# Altium PCB binbot_board_ver6.PcbDoc
Units mm, origin at the board's own origin, x right, y up, seen from the top; angles counter-clockwise.
Board outline 120.96 x 80.83 mm, 2 copper layers (Top Layer, Bottom Layer); 22 components, 0 nets, 99 pads, 46 vias.
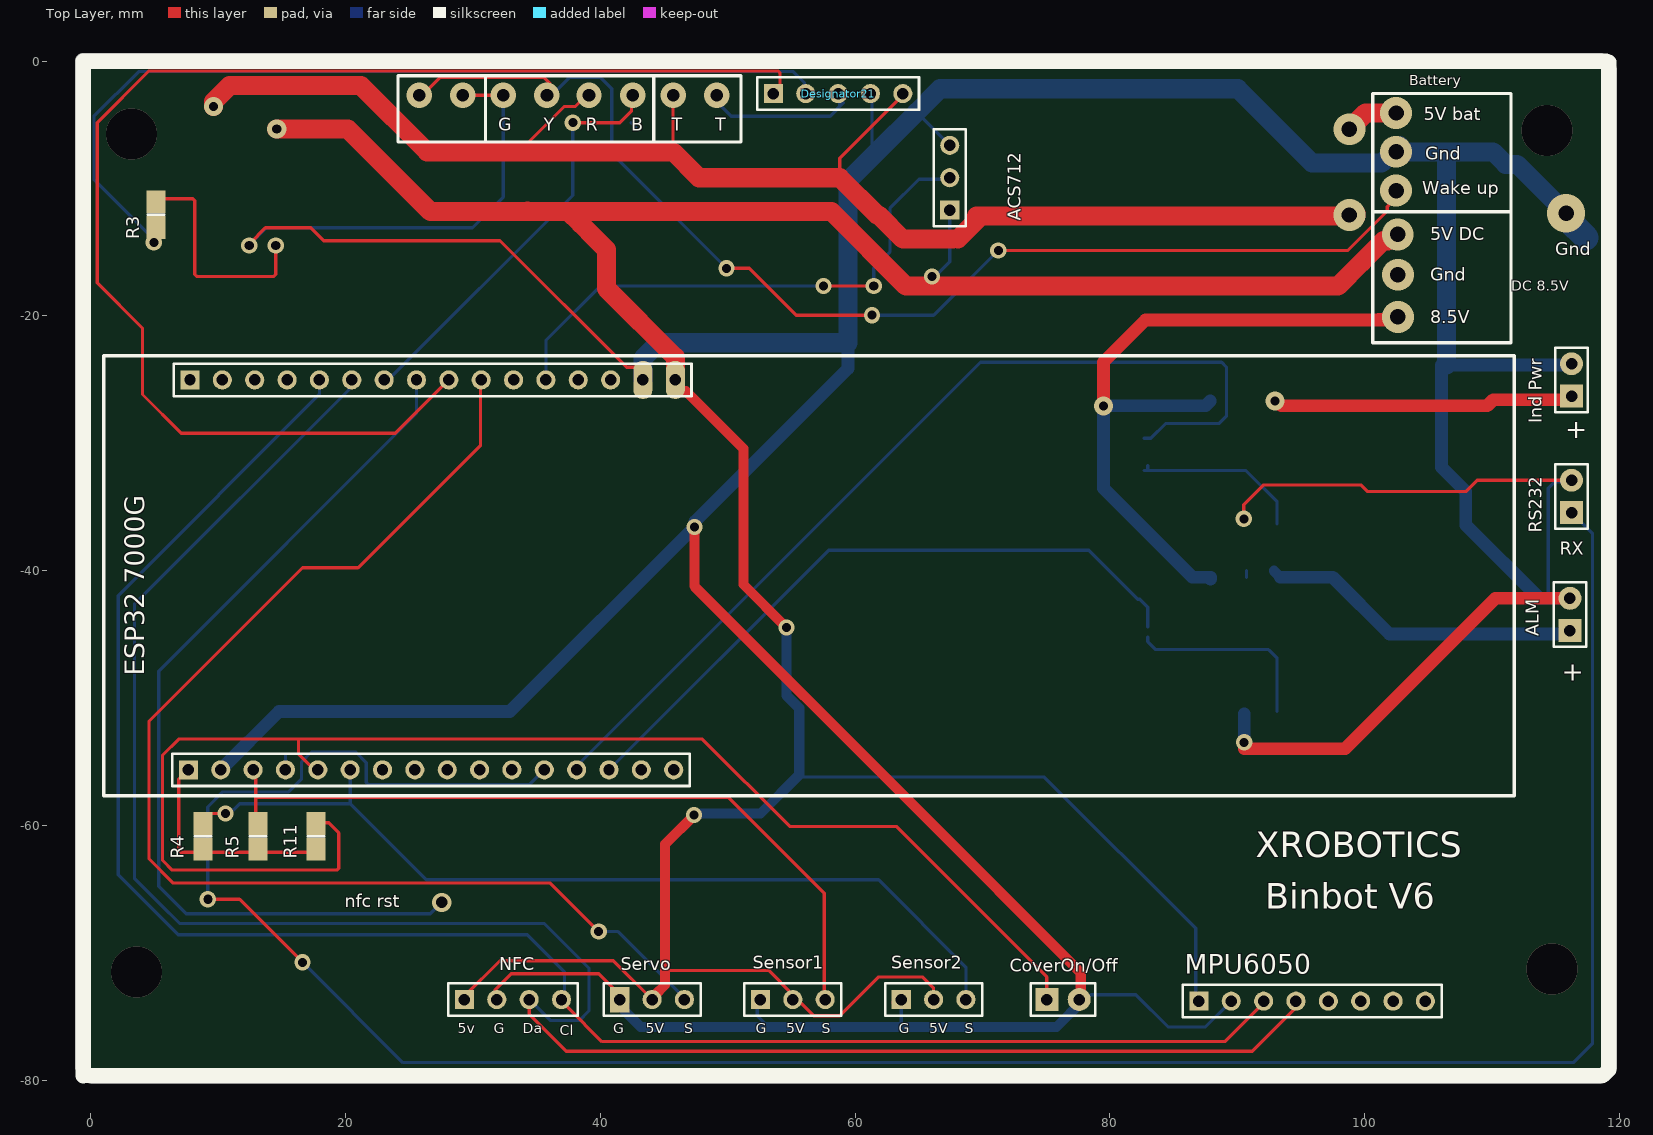
[diagram p0: Top Layer view]
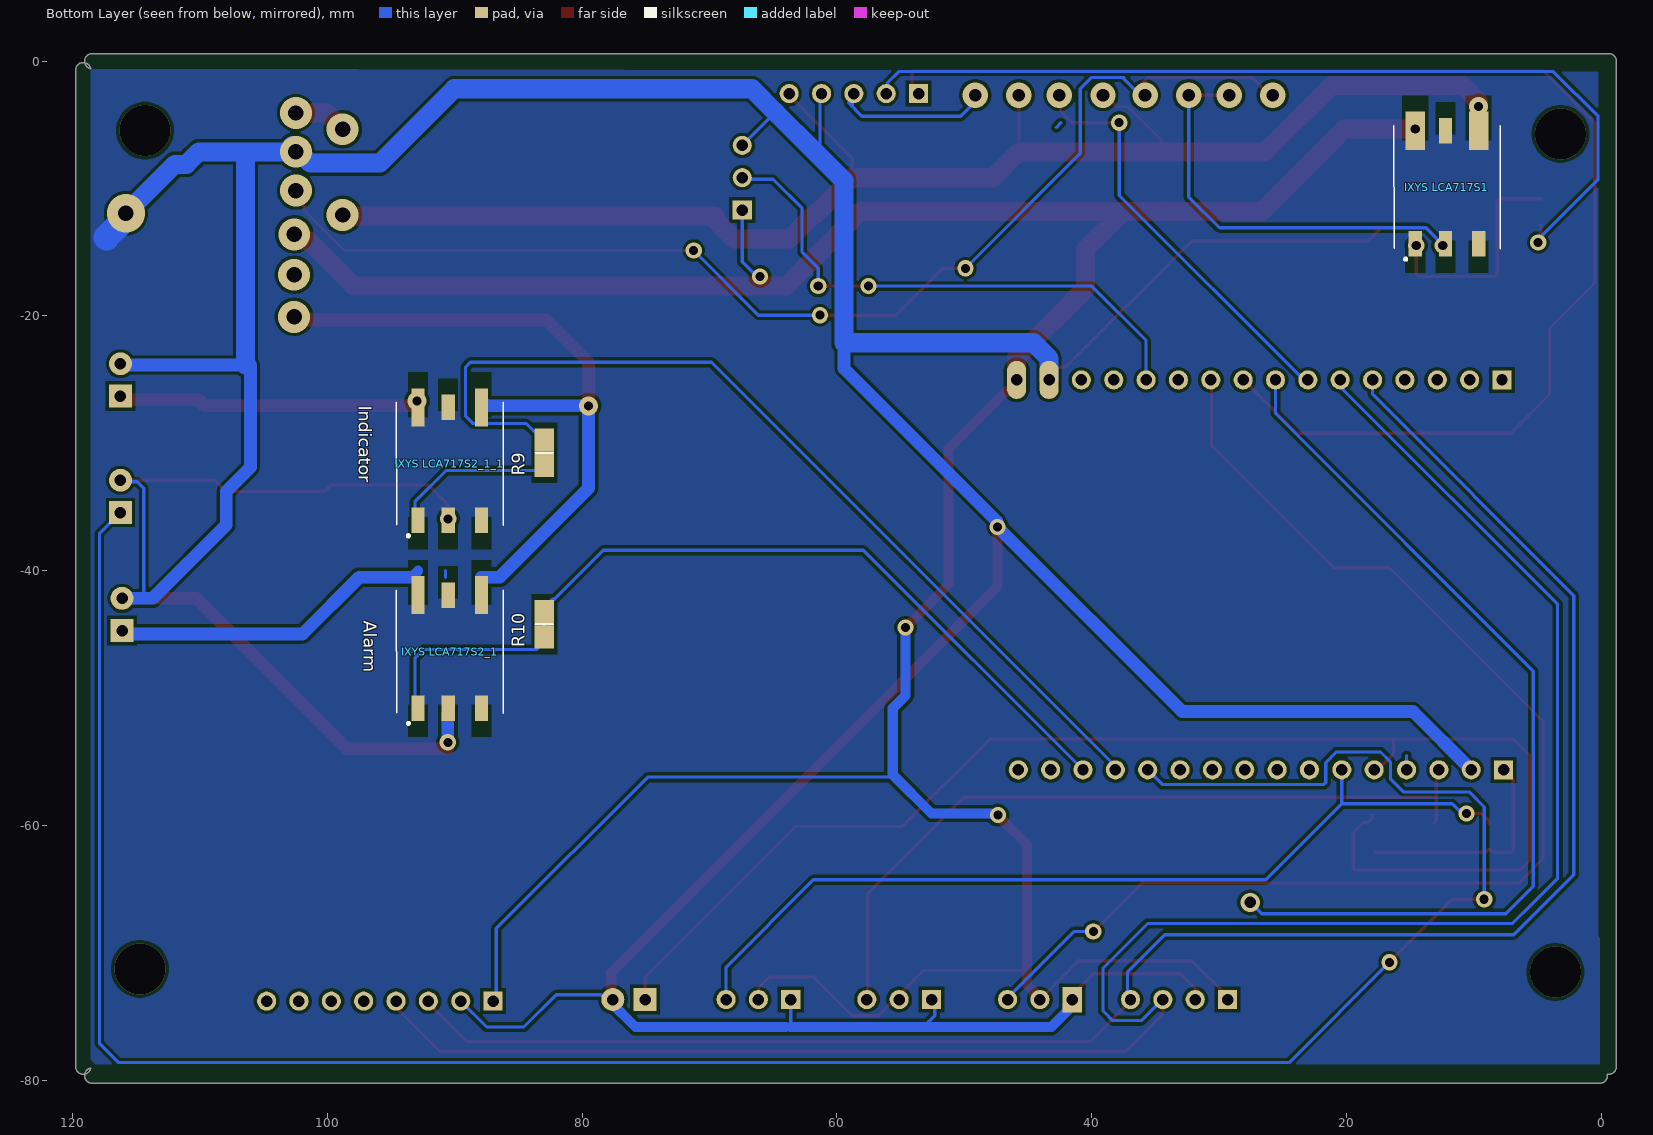
[diagram p1: Bottom Layer view, seen from below]

## Layer stack, top to bottom
Top Solder: solder mask 0.0102, Solder Resist, Dk 3.5
Top Layer: signal copper 0.0356
Dielectric 1: dielectric 0.32, FR-4, Dk 4.8
Bottom Layer: signal copper 0.0356
Bottom Solder: solder mask 0.0102, Solder Resist, Dk 3.5

## Board outline
-0.475,-79.516 cw(c-0.589,-78.926) -1.189,-78.926 -1.189,0 cw(c-0.589,0) -0.589,0.6 118.469,0.6 cw(c118.469,0) 119.07,0 119.059,-0.113 cw(c118.469,0) 118.583,-0.59 cw(c119.172,-0.703) 119.059,-0.113 cw(c119.172,-0.703) 119.773,-0.703 119.773,-78.926 cw(c119.172,-78.926) 119.059,-79.516 cw(c119.172,-78.926) 118.583,-79.039 cw(c118.469,-79.629) 119.059,-79.516 119.07,-79.629 cw(c118.469,-79.629) 118.469,-80.229 0.114,-80.229 cw(c0.114,-79.629)

## Design rules (kind name [scope] priority, off if disabled: settings)
Clearance [All] p1: gap=0.254 ignorepadtopadclearanceinfootprint=FALSE except(0: Arc-Hole Track-Hole SMDPad-Hole THPad-Hole Via-Hole Fill-Hole Poly-Hole Region-Hole Text-Hole)
PolygonConnect [All] p1: connectstyle=Relief reliefconductorwidth=0.254 reliefentries=4 polygonreliefangle="90 Angle" airgapwidth=0.254
RoutingVias [All] p1: holewidth=0.711 width=1.27 viastyle="Through Hole" minholewidth=0.711 minwidth=1.27 maxholewidth=0.711 maxwidth=1.27
SolderMaskExpansion [All] p1: expansion=0.102 istentingtop=FALSE
Width [All] p1: maxlimit=0.254 minlimit=0.254 preferedwidth=0.254
30 further rules are at their usual default settings.

## Components (designator, comment, footprint, x,y, rotation, side; value= is the part's Value field where it differs from the comment)
ACS712 "Comment" HDR1X3#1 67.437,-11.684 r90 top
ALM "Comment" HDR1X2 116.251,-26.289 r90 top
CoverOn/Off "Comment" HDR1X2 75.057,-73.66 r0 top
Designator21 "Comment" HDR1X5 53.594,-2.54 r0 top
"ESP32 7000G" "ESP32 7000G" HDR1X16#1 7.793,-25.019 r0 top
"Ind Pwr" "Comment" HDR1X2 116.124,-44.704 r90 top
"IXYS LCA717S1" "IXYS LCA717S" *SON160P500X500X140-6N#1 12.111,-9.897 r90 bottom
"IXYS LCA717S2_1" "IXYS LCA717S" *SON160P500X500X140-6N#2 90.394,-46.346 r90 bottom
"IXYS LCA717S2_1_1" "IXYS LCA717S" *SON160P500X500X140-6N#2 90.394,-31.614 r90 bottom
MPU6050 "Comment" HDR1X8 86.995,-73.787 r0 top
NFC "Comment" HDR1X4 29.337,-73.66 r0 top
R3 "0.5K Ohms" 6-0805_M 5.126,-12.065 r90 top (schematic designator R2)
R4 "4.7K Ohms" 6-0805_M 8.809,-60.833 r90 top (schematic designator R3)
R5 "4.7K Ohms" 6-0805_M 13.127,-60.833 r90 top (schematic designator R3)
R9 "0.5K Ohms" 6-0805_M 82.977,-30.75 r90 bottom (schematic designator R3)
R10 "0.5K Ohms" 6-0805_M 82.977,-44.212 r90 bottom (schematic designator R3)
R11 "4.7K Ohms" 6-0805_M 17.699,-60.833 r90 top (schematic designator R3)
RS232 "Comment" HDR1X2 116.251,-35.433 r90 top
Sensor1 "Comment" HDR1X3#1 52.578,-73.66 r0 top
Sensor2 "Comment" HDR1X3#1 63.627,-73.66 r0 top
Servo "Comment" HDR1X3#2 41.529,-73.66 r0 top
? "Comment" HDR1X16#2 7.666,-55.626 r0 top

## Footprints (in the part's own frame and the unit in brackets; to place one, negate y for a bottom-side part, rotate by r counter-clockwise, add the part's x,y. Pads: shape width x height; smd on the part's side, far side on the other; paste and mask are expansions set on the pad)
6-0805_M [mm] "Chip Resistor, Body 2.0x1.2mm, IPC Low Density"
  rect 1.8x1.5 smd: 1(-1,0) 2(1,0)
  silkscreen extent 0,-0.65 0,0.65, body extent -1.07,-0.7 1.07,0.7, height 0.7
*SON160P500X500X140-6N#1 [mm]
  rect 2x1.03 smd: 1(-4.436,2.489) 2(-4.436,0.127) 3(-4.436,-2.489) 5(4.436,0.127)
  rect 3x1.5 smd: 4(4.436,-2.489) 6(4.436,2.489)
  silkscreen extent -5.74,-4.19 4.83,4.19
*SON160P500X500X140-6N#2 [mm]
  rect 2x1.03 smd: 1(-4.436,2.489) 2(-4.436,0.127) 3(-4.436,-2.489) 5(4.436,0.127)
  rect 3x1.03 smd: 4(4.436,-2.489) 6(4.436,2.489)
  silkscreen extent -5.74,-4.19 4.83,4.19
HDR1X2 [mm] "Connector; Header; 2 Position"
  rect 1.8x1.8 hole 0.9: 1(0,0)
  round 1.8 hole 0.9: 2(2.54,0)
  silkscreen extent -1.27,-1.27 3.81,1.27
HDR1X3#1 [mm] "Connector; Header; 3 Position"
  rect 1.5x1.5 hole 0.9: 1(0,0)
  round 1.5 hole 0.9: 2(2.54,0) 3(5.08,0)
  silkscreen extent -1.27,-1.27 6.35,1.27
HDR1X3#2 [mm] "Connector; Header; 3 Position"
  rect 1.5x2 hole 0.9: 1(0,0)
  round 1.5 hole 0.9: 2(2.54,0) 3(5.08,0)
  silkscreen extent -1.27,-1.27 6.35,1.27
HDR1X4 [mm] "Connector; Header; 4 Position"
  rect 1.5x1.5 hole 0.9: 1(0,0)
  round 1.5 hole 0.9: 2(2.54,0) 3(5.08,0) 4(7.62,0)
  silkscreen extent -1.27,-1.27 8.89,1.27
HDR1X5 [mm] "Connector; Header; 5 Position"
  rect 1.5x1.5 hole 0.9: 1(0,0)
  round 1.5 hole 0.9: 2(2.54,0) 3(5.08,0) 4(7.62,0) 5(10.16,0)
  silkscreen extent -1.27,-1.27 11.43,1.27
HDR1X8 [mm] "Connector; Header; 8 Position"
  rect 1.5x1.5 hole 0.9: 1(0,0)
  round 1.5 hole 0.9: 2(2.54,0) 3(5.08,0) 4(7.62,0) 5(10.16,0) 6(12.7,0) 7(15.24,0) 8(17.78,0)
  silkscreen extent -1.27,-1.27 19.05,1.27
HDR1X16#1 [mm] "Connector; Header; 16 Position"
  rect 1.5x1.5 hole 0.9: 1(0,0)
  round 1.5 hole 0.9: 2(2.54,0) 3(5.08,0) 4(7.62,0) 5(10.16,0) 6(12.7,0) 7(15.24,0) 8(17.78,0) 9(20.32,0) 10(22.86,0) 11(25.4,0) 12(27.94,0) 13(30.48,0) 14(33.02,0)
  oval 1.5x3 hole 0.9: 15(35.56,0) 16(38.1,0)
  silkscreen extent -1.27,-1.27 39.37,1.27
HDR1X16#2 [mm] "Connector; Header; 16 Position"
  rect 1.5x1.5 hole 0.9: 1(0,0)
  round 1.5 hole 0.9: 2(2.54,0) 3(5.08,0) 4(7.62,0) 5(10.16,0) 6(12.7,0) 7(15.24,0) 8(17.78,0) 9(20.32,0) 10(22.86,0) 11(25.4,0) 12(27.94,0) 13(30.48,0) 14(33.02,0) 15(35.56,0) 16(38.1,0)
  silkscreen extent -1.27,-1.27 39.37,1.27

## Via types
v1: diameter 1.27, hole 0.711, Top Layer to Bottom Layer, 19 vias
v2: diameter 2.5, hole 1.2, Top Layer to Bottom Layer, 8 vias
v3: diameter 2, hole 1, Top Layer to Bottom Layer, 8 vias
v4: diameter 1.5, hole 0.711, Top Layer to Bottom Layer, 5 vias
v5: diameter 4, hole 4, Top Layer to Bottom Layer, 4 vias
v6: diameter 3, hole 1.2, Top Layer to Bottom Layer, 1 vias
v7: diameter 1.5, hole 0.9, Top Layer to Bottom Layer, 1 vias

## Nets (pads, with @x,y where several pads share a name; then routed paths per layer and width w, separated by ;. In a path a pad name is that pad's centre, name@x,y a point inside that pad or via, vN(x,y) a via of type N, cw(c..) or ccw(c..) an arc to the next point about the centre after c; other vN are vias at no path point)
pads on no net: "ESP32 7000G.1" "ESP32 7000G.2" "ESP32 7000G.3" "ESP32 7000G.4" "ESP32 7000G.5" "ESP32 7000G.6" "ESP32 7000G.7" "ESP32 7000G.8" "ESP32 7000G.9" "ESP32 7000G.10" "ESP32 7000G.11" "ESP32 7000G.12" "ESP32 7000G.13" "ESP32 7000G.14" "ESP32 7000G.15" "ESP32 7000G.16" "Ind Pwr.1" "Ind Pwr.2" "IXYS LCA717S1.1" "IXYS LCA717S1.2" "IXYS LCA717S1.3" "IXYS LCA717S1.4" "IXYS LCA717S1.5" "IXYS LCA717S1.6" "IXYS LCA717S2_1.1" "IXYS LCA717S2_1.2" "IXYS LCA717S2_1.3" "IXYS LCA717S2_1.4" "IXYS LCA717S2_1.5" "IXYS LCA717S2_1.6" "IXYS LCA717S2_1_1.1" "IXYS LCA717S2_1_1.2" "IXYS LCA717S2_1_1.3" "IXYS LCA717S2_1_1.4" "IXYS LCA717S2_1_1.5" "IXYS LCA717S2_1_1.6" ?.1 ?.2 ?.3 ?.4 ?.5 ?.6 ?.7 ?.8 ?.9 ?.10 ?.11 ?.12 ?.13 ?.14 ?.15 ?.16 ACS712.1 ACS712.2 ACS712.3 ALM.1 ALM.2 CoverOn/Off.1 CoverOn/Off.2 Designator21.1 Designator21.2 Designator21.3 Designator21.4 Designator21.5 MPU6050.1 MPU6050.2 MPU6050.3 MPU6050.4 MPU6050.5 MPU6050.6 MPU6050.7 MPU6050.8 NFC.1 NFC.2 NFC.3 NFC.4 R3.1 R3.2 R4.1 R4.2 R5.1 R5.2 R9.1 R9.2 R10.1 R10.2 R11.1 R11.2 RS232.1 RS232.2 Sensor1.1 Sensor1.2 Sensor1.3 Sensor2.1 Sensor2.2 Sensor2.3 Servo.1 Servo.2 Servo.3
copper on no net: | length 2440.8
  Top Layer w0.254: 4.711,-10.795 8.025,-10.795 8.174,-10.944 8.174,-16.742 8.323,-16.891 14.375,-16.891 14.524,-16.742 v1(14.524,-14.478) ; v1@4.745,-14.351 4.745,-12.827 ; 7.666,-55.626 6.916,-56.376 6.916,-56.884 6.916,-61.954 7.065,-62.103 8.539,-62.103 8.809,-61.833 9.079,-62.103 13.127,-62.103 17.849,-62.103 ; 8.809,-59.833 8.809,-59.678 9.432,-59.055 v1@10.333,-59.055 ; v1(9.19,-65.786) 11.684,-65.786 v1(16.637,-70.739) ; v1(12.446,-14.478) v1@12.446,-14.219 ; v1@12.512,-14.285 13.716,-13.081 17.272,-13.081 18.288,-14.097 32.131,-14.097 42.065,-24.031 42.778,-24.031 43.353,-24.606 43.353,-24.765 43.353,-25.019 ; 12.746,-55.626 12.954,-55.834 12.954,-57.785 12.954,-59.66 13.127,-59.833 ; 13.072,-57.785 50.038,-57.785 57.577,-65.324 57.577,-73.833 57.785,-74.041 ; 15.667,-55.626 15.667,-55.507 ; 17.789,-55.843 16.302,-54.356 16.302,-53.213 ; 17.953,-25.227 17.953,-25.019 ; 18.005,-59.107 18.005,-59.466 18.322,-59.783 18.681,-59.783 19.477,-60.579 19.477,-63.351 19.328,-63.5 6.396,-63.5 5.634,-62.738 5.634,-54.483 6.904,-53.213 16.302,-53.213 ; v3@25.781,-2.159 26.543,-2.159 27.432,-1.27 35.56,-1.27 v3@36.068,-1.778 ; 28.113,-25.019 23.922,-29.21 7.112,-29.21 4.064,-26.162 4.064,-20.955 0.508,-17.399 0.508,-4.826 4.572,-0.762 53.953,-0.762 54.102,-0.911 54.102,-2.159 53.721,-2.54 ; v3(29.21,-2.667) v3(32.385,-2.667) v3@32.131,-2.921 ; 29.337,-73.406 32.131,-70.612 41.021,-70.612 43.942,-73.533 44.069,-73.533 45.085,-72.517 ; 30.607,-25.235 30.607,-30.145 20.987,-39.765 16.623,-39.765 4.572,-51.816 4.572,-62.611 6.477,-64.516 32.639,-64.516 35.433,-64.516 36.068,-64.516 v1(39.878,-68.326) ; 31.75,-73.787 31.75,-72.898 33.02,-71.628 39.878,-71.628 41.529,-73.279 ; 34.417,-73.66 34.417,-74.803 37.338,-77.724 91.186,-77.724 94.615,-74.295 94.615,-73.914 ; 34.504,-7.215 34.504,-6.223 37.171,-3.556 38.052,-3.556 v3@38.941,-2.667 ; 36.703,-73.533 37.437,-74.267 40.132,-76.962 43.942,-76.962 89.039,-76.962 92.081,-73.92 ; 37.511,-11.811 37.511,-11.557 ; v1(37.846,-4.826) 41.529,-4.826 42.456,-3.899 42.456,-2.756 v3(42.545,-2.667) ; 40.321,-24.781 40.492,-24.781 41.067,-25.356 41.067,-25.527 ; 45.085,-71.374 53.213,-71.374 55.118,-73.279 56.769,-74.93 58.801,-74.93 61.087,-72.644 61.849,-71.882 63.627,-71.882 64.135,-71.882 65.278,-71.882 66.167,-72.771 66.167,-73.533 ; 45.72,-7.366 45.72,-7.112 v3(45.72,-2.667) ; v1(49.911,-16.256) 51.689,-16.256 55.372,-19.939 v1@61.214,-19.939 ; 52.324,-73.533 52.324,-73.279 ; v1(57.531,-17.653) v1(61.468,-17.653) ; 58.801,-9.144 58.801,-7.62 63.881,-2.54 ; 67.437,-11.684 67.617,-11.684 ; v1(71.247,-14.859) 98.679,-14.859 101.78,-11.758 101.78,-11.432 102.031,-11.181 102.031,-10.265 v2@101.78,-10.014 ; 75.057,-73.66 75.057,-71.882 63.246,-60.071 54.864,-60.071 48.006,-53.213 16.302,-53.213 ; 77.47,-73.279 77.724,-73.025 ; v1(90.521,-35.923) 90.521,-34.798 90.539,-34.78 91.537,-33.782 92.045,-33.274 99.733,-33.274 100.241,-33.782 107.95,-33.782 108.839,-32.893 109.495,-32.893 116.251,-32.893 117.024,-32.893 ; v1@90.551,-53.975 v1(90.551,-53.467) ; 101.346,-20.32 v2@101.6,-20.066
  Top Layer w0.5: 115.87,-26.67 116.251,-26.289
  Top Layer w0.8: 44.069,-73.533 44.323,-73.279 45.085,-72.517 45.085,-71.374 45.085,-61.468 v1(47.371,-59.182) ; 45.893,-25.065 45.893,-25.58 46.217,-25.903 46.731,-25.903 51.243,-30.415 51.243,-40.386 51.243,-41.083 v1(54.61,-44.45) ; v1(47.388,-36.559) 47.388,-41.208 64.77,-58.591 77.724,-71.545 77.724,-73.025 ; 63.277,-73.883 63.627,-73.533 ; 115.78,-26.58 115.87,-26.67
  Top Layer w1: v4(79.502,-27.051) 79.502,-23.622 82.804,-20.32 v2@101.6,-20.32 ; v1@90.749,-53.975 90.551,-53.975 98.471,-53.975 110.282,-42.164 116.124,-42.164 ; v4(92.964,-26.67) 93.099,-26.67 93.48,-27.051 109.628,-27.051 110.099,-26.58 115.78,-26.58 ; 101.075,-20.32 101.138,-20.257 101.283,-20.257 101.346,-20.32
  Top Layer w1.5: v4(9.652,-3.556) 9.652,-3.165 10.912,-1.905 21.209,-1.905 26.416,-7.112 34.504,-7.112 45.72,-7.112 47.752,-9.144 58.801,-9.144 61.722,-12.065 61.849,-12.065 63.754,-13.97 67.691,-13.97 ; v4(14.605,-5.334) 20.193,-5.334 26.67,-11.811 29.337,-11.811 34.227,-11.811 34.29,-11.747 34.354,-11.811 37.511,-11.811 ; 40.177,-14.477 39.58,-13.88 ; 45.893,-25.019 45.893,-23.241 40.492,-17.839 40.492,-14.791 39.58,-13.88 ; 68.072,-13.97 69.903,-12.139 ; 69.522,-12.139 v2@99.314,-12.139 ; v2@99.06,-5.08 100.076,-4.064 102.016,-4.064 v2@102.016,-3.937 ; v2@99.187,-12.065 v2@99.314,-11.938 ; v2(102.605,-13.589) 102.334,-13.589 101.834,-14.089 101.481,-14.089 99.788,-15.782 97.917,-17.653 64.008,-17.653 58.166,-11.811 37.511,-11.811 ; 37.511,-11.811 38.471,-12.771 39.58,-13.88
  Bottom Layer w0.254: v1(4.953,-14.224) 4.953,-13.97 0.254,-9.271 0.254,-4.318 3.763,-0.809 55.165,-0.809 56.033,-1.677 56.033,-1.964 56.285,-2.217 56.573,-2.217 ; v1(9.19,-65.786) 9.19,-58.547 10.373,-57.364 15.528,-57.364 16.556,-56.336 16.556,-55.003 17.33,-54.229 20.801,-54.229 21.636,-55.064 21.636,-56.626 21.785,-56.775 34.458,-56.775 35.606,-55.626 ; v1(10.587,-59.055) 10.862,-59.055 11.159,-58.758 11.219,-58.758 11.684,-58.293 20.382,-58.293 ; v1@12.746,-14.097 13.762,-13.081 29.972,-13.081 32.385,-10.668 v3(32.385,-2.667) ; 15.286,-55.626 15.286,-54.527 ; v1(16.637,-70.739) 24.511,-78.613 116.378,-78.613 117.902,-77.089 117.902,-37.084 116.251,-35.433 ; 17.826,-24.892 18.207,-24.511 ; 17.953,-25.019 17.953,-26.159 2.159,-41.954 2.159,-63.881 6.858,-68.58 31.75,-68.58 34.276,-68.58 37.201,-71.505 37.201,-72.888 37.195,-72.894 37.195,-74.025 37.201,-74.031 ; 18.207,-55.626 18.398,-55.816 ; 20.366,-55.626 20.382,-55.642 20.382,-58.293 ; 20.493,-25.572 20.278,-25.572 20.255,-25.595 20.255,-25.81 3.429,-42.636 3.429,-64.135 5.461,-66.167 6.985,-67.691 19.929,-67.691 35.614,-67.691 39.116,-71.193 39.116,-74.549 38.354,-75.311 36.114,-75.311 34.44,-73.637 ; 20.493,-25.145 20.493,-25.019 ; 23.033,-25.019 23.368,-25.019 37.846,-10.541 v1(37.846,-4.826) ; 25.573,-25.019 25.573,-27.64 5.334,-47.879 5.334,-64.77 6.985,-66.421 7.493,-66.929 26.669,-66.929 v7@27.558,-66.04 ; v3(29.21,-2.667) v3@29.273,-2.73 ; 35.733,-25.019 35.733,-21.925 40.005,-17.653 49.012,-17.653 v1(57.531,-17.653) ; v3@36.195,-2.667 37.592,-1.27 ; 37.465,-1.27 40.005,-1.27 40.894,-2.159 40.894,-7.239 v1(49.911,-16.256) ; 38.146,-55.626 38.146,-55.326 69.85,-23.622 88.773,-23.622 89.154,-24.003 89.154,-27.863 88.569,-28.448 84.374,-28.448 83.231,-29.591 82.677,-29.591 ; v3@38.941,-2.667 v3(39.116,-2.667) ; v1(39.878,-68.326) 41.402,-68.326 46.609,-73.533 ; 40.686,-55.626 57.926,-38.386 78.351,-38.386 82.204,-42.239 82.354,-42.239 82.977,-42.862 82.977,-43.012 82.977,-44.39 ; 42.418,-4.826 42.799,-5.207 ; 43.226,-55.626 43.371,-55.77 ; v3@45.593,-2.54 v3(45.72,-2.667) ; v3@48.641,-2.667 50.292,-4.318 52.451,-4.318 52.903,-4.318 58.039,-4.318 59.081,-3.276 59.081,-3.232 ; 52.143,-73.479 52.476,-73.479 53.153,-74.156 ; 52.324,-74.041 52.324,-74.93 53.213,-75.819 ; 55.433,-56.2 74.869,-56.2 86.741,-68.072 86.741,-73.533 86.995,-73.787 ; 58.801,-3.512 58.801,-2.516 ; v1@61.214,-19.939 66.167,-19.939 v1(71.247,-14.859) ; 61.341,-7.493 61.341,-2.54 ; v1(61.468,-17.653) 61.468,-16.256 62.738,-14.986 62.738,-11.557 65.024,-9.271 67.437,-9.271 ; 64.834,-4 67.344,-6.511 ; v1@66.04,-17.145 67.437,-15.748 67.437,-11.684 ; 68.707,-73.66 68.707,-73.242 68.707,-71.12 61.849,-64.262 26.351,-64.262 20.382,-58.293 ; 68.753,-73.242 69.007,-73.496 ; 68.961,-74.041 69.007,-73.995 69.007,-73.496 ; 69.283,-73.771 69.007,-73.496 ; 77.597,-73.66 77.893,-73.364 78.434,-73.364 78.519,-73.279 82.042,-73.279 84.582,-75.819 87.503,-75.819 89.535,-73.787 ; 82.677,-32.131 90.678,-32.131 93.137,-34.59 93.137,-36.322 ; 82.977,-45.212 82.977,-45.562 83.6,-46.185 92.459,-46.185 92.502,-46.228 93.137,-46.863 93.137,-51.054 ; 82.977,-32.1 82.977,-31.75 ; 90.551,-51.252 90.48,-51.181 90.629,-51.032 ; 90.724,-40.513 90.724,-40.005 ; 114.427,-41.783 114.427,-33.528 114.935,-33.02 115.951,-33.02 ; v6@115.997,-12.461 v6@115.997,-11.938 ; 116.251,-23.749 116.257,-23.749 116.759,-23.247 ; 117.378,-13.843 117.475,-13.843
  Bottom Layer w0.3: 63.627,-75.477 63.627,-73.66
  Bottom Layer w0.8: 41.529,-73.66 41.879,-74.01 41.879,-74.518 43.18,-75.819 53.213,-75.819 63.627,-75.819 ; v1(47.371,-59.182) 47.461,-59.092 47.867,-59.092 47.904,-59.055 49.606,-59.055 52.578,-59.055 55.626,-56.007 55.626,-54.705 55.626,-52.102 55.626,-50.8 54.61,-49.784 v1(54.61,-44.45) ; 64.031,-75.819 75.819,-75.819 77.851,-73.787 ; 92.883,-40.005 93.391,-40.513
  Bottom Layer w1: 10.206,-55.626 14.778,-51.054 32.893,-51.054 v1(47.388,-36.559) 47.439,-36.508 47.439,-36.127 59.453,-24.113 59.453,-22.098 ; 87.89,-26.678 87.517,-27.051 v4(79.502,-27.051) 79.502,-33.528 86.476,-40.502 87.89,-40.502 87.905,-40.517 87.905,-40.648 ; v1(90.551,-53.467) 90.551,-51.252 ; 93.391,-40.513 97.506,-40.513 101.951,-44.958 116.124,-44.958 ; 116.119,-23.856 106.045,-23.856 106.045,-31.877 107.95,-33.782 107.95,-36.403 113.711,-42.164 116.505,-42.164
  Bottom Layer w1.5: 43.353,-25.019 43.353,-23.322 44.577,-22.098 59.182,-22.098 ; 59.453,-22.098 59.453,-9.381 61.722,-7.112 64.834,-4 66.675,-2.159 90.043,-2.159 95.885,-8.001 101.346,-8.001 v2@102.743,-6.604 ; v2(102.478,-7.112) 106.426,-7.112 ; 106.426,-23.856 106.426,-7.112 ; v6(115.824,-11.938) 111.982,-8.096 111.082,-8.096 110.098,-7.112 106.426,-7.112
  Bottom Layer w2: v6@115.997,-12.461 117.378,-13.843
  other v1: 61.341,-19.939 66.04,-16.891
  other v2: 102.616,-20.066 102.616,-16.764 98.806,-12.065 102.478,-10.16 98.806,-5.334 102.478,-4.064
  other v3: 25.781,-2.667 35.814,-2.667 49.149,-2.667
  other v4: 79.502,-27.051
  other v5: 3.602,-71.501 114.727,-71.247 3.198,-5.703 114.323,-5.449
  other v7: 27.559,-66.04

## Polygon pours and split planes (outlines as drawn)
no net on Bottom Layer "NONET_L02_P001" (solid, pour order 1): 118.583,-0.59 118.583,-78.394 118.237,-78.74 0.127,-78.74 0.127,-68.834 0.254,-68.707 0.254,-0.809

## Silkscreen, mask and mechanical layers (free items; w line width, h text height)
Top Overlay:
  lines w0.254: 100.64,-11.811 111.506,-11.811 ; 100.64,-9.977 100.64,-2.54 109.474,-2.54 111.506,-2.54 111.506,-11.811 ; 100.64,-9.525 100.64,-22.098 111.506,-22.098 111.506,-11.811 ; 110.998,-11.811 111.506,-11.811 ; 30.988,-6.35 24.13,-6.35 24.13,-1.143 30.988,-1.143 ; 30.988,-6.35 30.988,-1.143 ; 30.988,-6.35 44.196,-6.35 ; 30.988,-1.143 44.196,-1.143 ; 44.196,-6.35 51.054,-6.35 51.054,-1.143 48.863,-1.143 46.26,-1.143 44.196,-1.143 ; 44.196,-6.35 44.196,-4.191 44.196,-1.143 ; 1.016,-57.658 1.016,-23.114 111.76,-23.114 111.76,-56.515 111.76,-57.658 110.617,-57.658 1.016,-57.658
  lines w1.2: -0.589,-79.647 -0.589,0 118.97,0 ; -0.468,-79.629 118.718,-79.629 119.172,-79.175 119.172,-0.057
  text "Battery" at 103.505,-1.892 h0.8
  text "5V bat" at 104.648,-4.641 h1
  text "G" at 32.004,-5.461 h1
  text "Y" at 35.56,-5.461 h1
  text "R" at 38.862,-5.461 h1
  text "B" at 42.418,-5.461 h1
  text "T" at 45.593,-5.461 h1
  text "T" at 49.022,-5.461 h1
  text "Gnd" at 104.775,-7.747 h1
  text "Wake up" at 104.521,-10.462 h1
  text "5V DC" at 105.156,-14.047 h1
  text "Gnd" at 114.96,-15.24 h1
  text "Gnd" at 105.156,-17.222 h1
  text "DC 8.5V" at 111.506,-18.034 h0.8
  text "8.5V" at 105.156,-20.574 h1
  text "+" at 115.743,-29.591 h1.52
  text "RX" at 115.316,-38.735 h1
  text "+" at 115.489,-48.641 h1.52
  text "XROBOTICS" at 91.44,-62.484 h2
  text "nfc rst" at 19.939,-66.421 h1
  text "Binbot V6" at 92.202,-66.548 h2
  text "5v" at 28.829,-76.327 h0.8
  text "G" at 31.623,-76.327 h0.8
  text "Da" at 33.909,-76.327 h0.8
  text "G" at 41.021,-76.327 h0.8
  text "5V" at 43.561,-76.327 h0.8
  text "S" at 46.609,-76.327 h0.8
  text "G" at 52.197,-76.327 h0.8
  text "5V" at 54.61,-76.327 h0.8
  text "S" at 57.404,-76.327 h0.8
  text "G" at 63.415,-76.327 h0.8
  text "5V" at 65.828,-76.327 h0.8
  text "S" at 68.622,-76.327 h0.8
  text "Cl" at 36.83,-76.454 h0.8
Bottom Overlay:
  text "Indicator" at 97.536,-27.051 h1 r90
  text "Alarm" at 97.155,-43.942 h1 r90